# Altium PCB Board.PcbDoc (part 2 of 2)
Units mm, origin at the board's own origin, x right, y up, seen from the top; angles counter-clockwise.
Board outline 55 x 40 mm, 4 copper layers (Top Layer, Internal Plane 1, Internal Plane 2, Bottom Layer), stack 1.641 mm thick; 72 components, 51 nets, 279 pads, 135 vias.
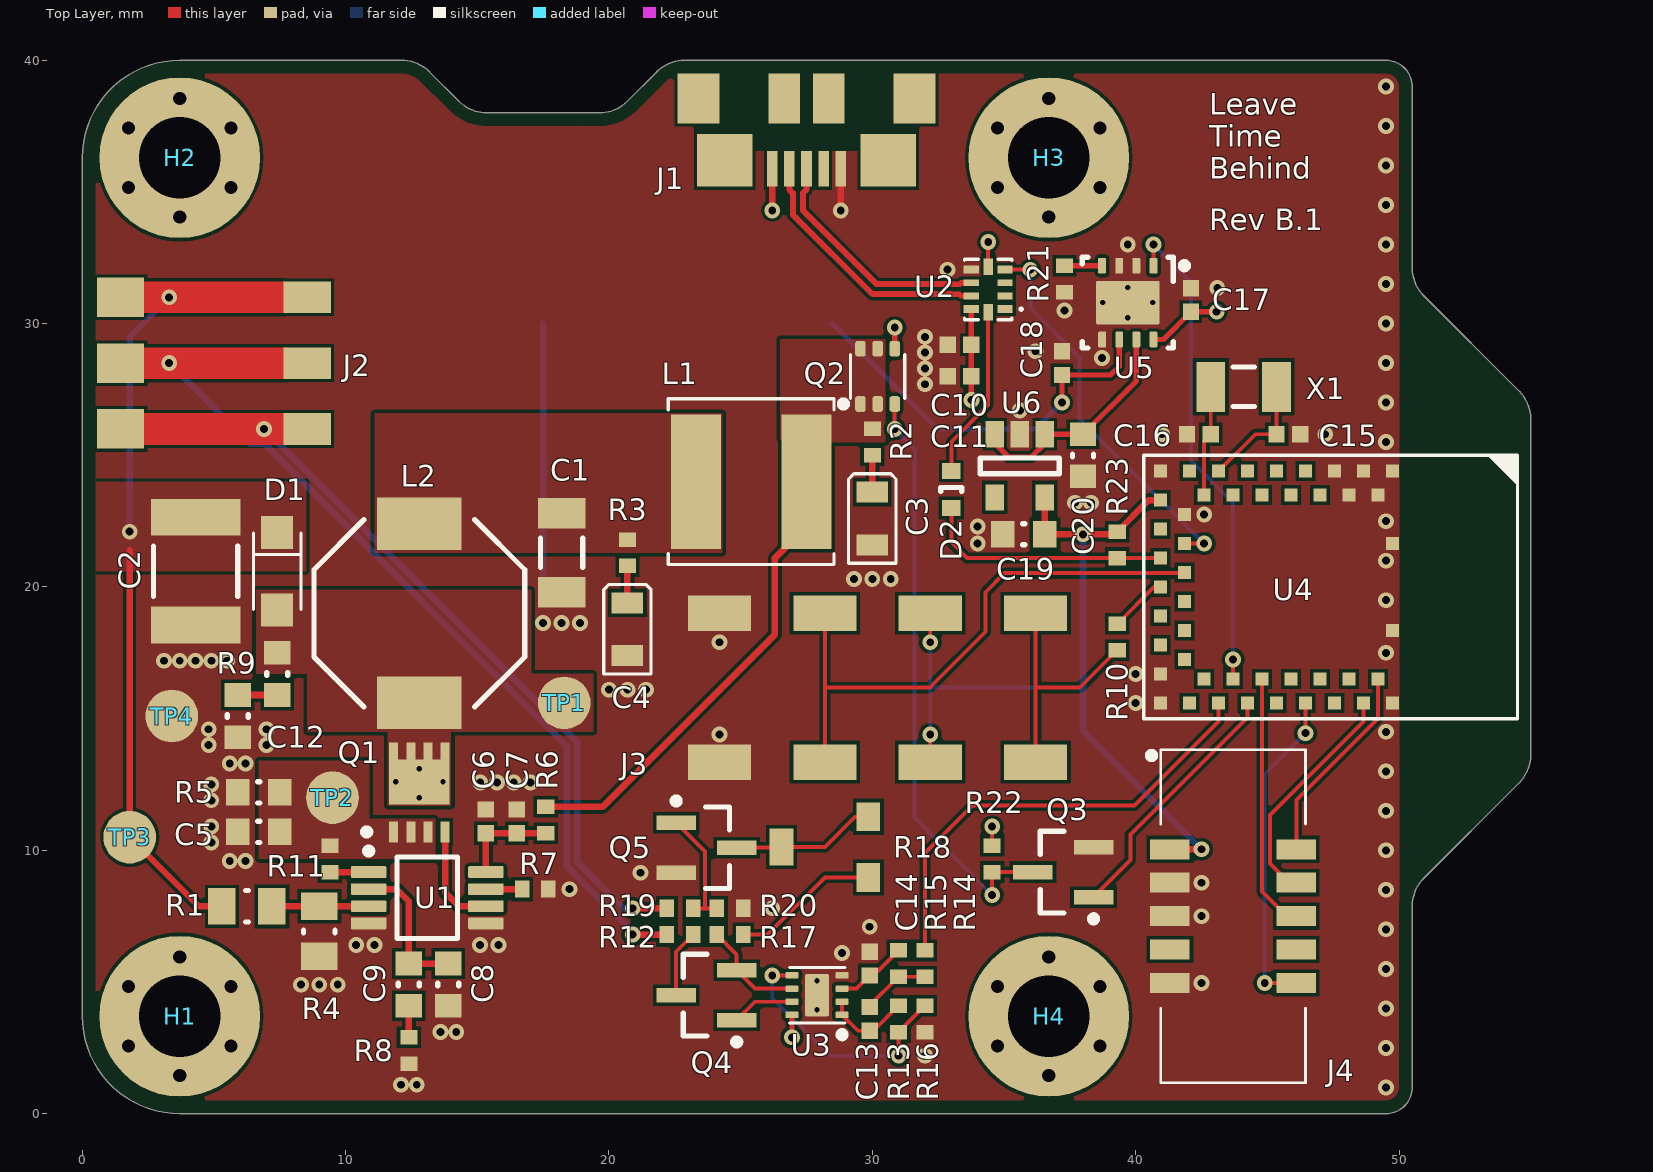
[diagram p0: Top Layer view]

## Part data (continued)
R9: library part CRCW06035R62FKEA, "RES SMD 5.62 OHM 1% 1/10W 0603", Case/Package=0603, Case Code (Metric)=1608, Manufacturer="Vishay Dale", Max Operating Temperature=155°C, Max Power Dissipation=100mW, Min Operating Temperature=-55°C, Package Quantity=10, Resistance=5.62R, Supplier Part Number 1=541-5.62HHCT-ND, Temperature Coefficient=100ppm/°C, Tolerance=1%, Voltage Rating=75V, Case Code (Imperial)=0603, ComponentLink1Description=http://www.vishay.com/docs/20035/dcrcwe3.pdf, ComponentLink1URL=http://www.vishay.com/docs/20035/dcrcwe3.pdf, Composition="Thick Film", Contact Plating=Tin, Depth=0.85mm, Features="Automotive AEC-Q200", Height=0.02inch, Lead Free="Lead Free", Length=1.55mm, Manufacturer Part Number=CRCW06035R62FKEA, Military Standard=Not, Number of Pins=2, Number of Terminations=2, Packaging="Tape and Reel", Power Rating=100mW, Pricing 1="1=0.1, 10=0.046, 100=0.0187, 1000=0.0084, 2500=0.00729 (USD)", Pricing 2="1=0.1, 10=0.044, 50=0.044, 100=0.026, 1000=0.018, 10000=0.006 (USD)", REACH SVHC=Unknown, Stock 1=1833, Stock 2=70897, Supplier 1=Digi-Key, Supplier 2=Mouser, Supplier Part Number 2=71-CRCW0603-5.62-E3, Voltage Rating (DC)=75V, Weight=7.1E-05oz, Width=0.033inch
R10: library part RC0402FR-07220RL, "RES SMD 220 OHM 1% 1/16W 0402", Case/Package=0402, Case Code (Metric)=1005, Manufacturer=Yageo, Max Operating Temperature=155°C, Max Power Dissipation=63mW, Min Operating Temperature=-55°C, Package Quantity=1, Power Rating=62.5mW, Resistance=220R, Supplier Part Number 1=311-220LRCT-ND, Temperature Coefficient=100ppm/°C, Tolerance=1%, Voltage Rating=50V, Case Code (Imperial)=0402, ComponentLink1Description=http://www.yageo.com/documents/recent/PYu-RC_Group_51_RoHS_L_9.pdf, ComponentLink1URL=http://www.yageo.com/documents/recent/PYu-RC_Group_51_RoHS_L_9.pdf, ComponentLink2Description=http://documents.rs-components.com/techlib://itc_doclist_GB.htm?stockno=6186324, ComponentLink2URL=http://documents.rs-components.com/techlib://itc_doclist_GB.htm?stockno=6186324, ComponentLink3Description=http://www.yageo.com/documents/recent/PYu-RC0402_51_RoHS_L_6_r.pdf, ComponentLink3URL=http://www.yageo.com/documents/recent/PYu-RC0402_51_RoHS_L_6_r.pdf, Composition="Thick Film", Depth=0.5mm, Features="Moisture Resistant", Height=0.016inch, Lead Free="Lead Free", Length=1mm, Manufacturer Part Number=RC0402FR-07220RL, Military Standard=Not, Number of Pins=2, Number of Terminations=2, Packaging="Tape and Reel", Pricing 1="1=0.1, 10=0.018, 100=0.0073, 1000=0.00329, 2500=0.00286, 5000=0.00236 (USD)", REACH SVHC="No SVHC", Stock 1=5150470, Supplier 1=Digi-Key, Termination=SMD/SMT, Voltage Rating (DC)=50V, Width=0.02inch
R11: library part RC0402FR-07470RL, "RES SMD 470 OHM 1% 1/16W 0402", Case/Package=0402, Case Code (Metric)=1005, Manufacturer=Yageo, Max Operating Temperature=155°C, Max Power Dissipation=63mW, Min Operating Temperature=-55°C, Package Quantity=1, Power Rating=62.5mW, Resistance=470R, Supplier Part Number 1=311-470LRCT-ND, Temperature Coefficient=100ppm/°C, Tolerance=1%, Voltage Rating=50V, Case Code (Imperial)=0402, ComponentLink1Description=http://www.yageo.com/documents/recent/PYu-RC_Group_51_RoHS_L_9.pdf, ComponentLink1URL=http://www.yageo.com/documents/recent/PYu-RC_Group_51_RoHS_L_9.pdf, ComponentLink2Description=http://www.yageo.com/documents/recent/PYu-RC_Group_51_RoHS_L_10.pdf, ComponentLink2URL=http://www.yageo.com/documents/recent/PYu-RC_Group_51_RoHS_L_10.pdf, ComponentLink3Description=http://www.farnell.com/datasheets/1018594.pdf, ComponentLink3URL=http://www.farnell.com/datasheets/1018594.pdf, ComponentLink4Description=https://www.verical.com/server-webapp/html/getDatasheet?partID=330246, ComponentLink4URL=https://www.verical.com/server-webapp/html/getDatasheet?partID=330246, ComponentLink5Description=http://documents.rs-components.com/techlib://itc_doclist_GB.htm?stockno=6184457, ComponentLink5URL=http://documents.rs-components.com/techlib://itc_doclist_GB.htm?stockno=6184457, Composition="Thick Film", Depth=0.5mm, Features="Moisture Resistant", Height=0.016inch, Lead Free="Lead Free", Length=1mm, Manufacturer Part Number=RC0402FR-07470RL, Military Standard=Not, Number of Terminations=2, Packaging="Tape and Reel", Pricing 1="1=0.1, 10=0.016, 100=0.0067, 1000=0.00301, 2500=0.00261, 5000=0.00215 (USD)", REACH SVHC=Unknown, Stock 1=6739352, Supplier 1=Digi-Key, Termination=SMD/SMT, Width=0.02inch
R12: library part RC0402FR-073KL, "RES SMD 3K OHM 1% 1/16W 0402", Manufacturer=Yageo, Operating Temperature="-55°C ~ 155°C", Package / Case="0402 (1005 Metric)", Power (Watts)="0.063W, 1/16W", Supplier Device Package=0402, Supplier Part Number 1=311-3KLRCT-ND, Temperature Coefficient=±100ppm/°C, Tolerance=±1%, Category=Resistors, ComponentLink1Description=http://www.yageo.com/documents/recent/PYu-RC_Group_51_RoHS_L_9.pdf, ComponentLink1URL=http://www.yageo.com/documents/recent/PYu-RC_Group_51_RoHS_L_9.pdf, Composition="Thick Film", Failure Rate=-, Features="Moisture Resistant", Height - Seated (Max)="0.016\" (0.40mm)", Manufacturer Part Number=RC0402FR-073KL, Packaging="Cut Tape (CT)", Part Status=Active, Pricing 1="1=0.1, 10=0.018, 100=0.0076, 1000=0.00356, 2500=0.00313, 5000=0.00263 (USD)", RoHS="RoHS Compliant", Size / Dimension="0.039\" L x 0.020\" W (1.00mm x 0.50mm)", Stock 1=3701800, Supplier 1=Digi-Key
R13: library part RC0402FR-0718KL, "RES SMD 18K OHM 1% 1/16W 0402", Manufacturer=Yageo, Operating Temperature="-55°C ~ 155°C", Package / Case="0402 (1005 Metric)", Power (Watts)="0.063W, 1/16W", Supplier Device Package=0402, Supplier Part Number 1=311-18.0KLRCT-ND, Temperature Coefficient=±100ppm/°C, Tolerance=±1%, Category=Resistors, ComponentLink1Description=http://www.yageo.com/documents/recent/PYu-RC_Group_51_RoHS_L_9.pdf, ComponentLink1URL=http://www.yageo.com/documents/recent/PYu-RC_Group_51_RoHS_L_9.pdf, Composition="Thick Film", Failure Rate=-, Features="Moisture Resistant", Height - Seated (Max)="0.016\" (0.40mm)", Manufacturer Part Number=RC0402FR-0718KL, Packaging="Cut Tape (CT)", Part Status=Active, Pricing 1="1=0.1, 10=0.018, 100=0.0076, 1000=0.00356, 2500=0.00313, 5000=0.00263 (USD)", RoHS="RoHS Compliant", Size / Dimension="0.039\" L x 0.020\" W (1.00mm x 0.50mm)", Stock 1=0, Supplier 1=Digi-Key
R14: library part RC0402FR-07300KL, "RES SMD 300K OHM 1% 1/16W 0402", Manufacturer=Yageo, Operating Temperature="-55°C ~ 155°C", Package / Case="0402 (1005 Metric)", Power (Watts)="0.063W, 1/16W", Supplier Device Package=0402, Supplier Part Number 1=311-300KLRCT-ND, Temperature Coefficient=±100ppm/°C, Tolerance=±1%, Category=Resistors, ComponentLink1Description=http://www.yageo.com/documents/recent/PYu-RC_Group_51_RoHS_L_9.pdf, ComponentLink1URL=http://www.yageo.com/documents/recent/PYu-RC_Group_51_RoHS_L_9.pdf, Composition="Thick Film", Failure Rate=-, Features="Moisture Resistant", Height - Seated (Max)="0.016\" (0.40mm)", Manufacturer Part Number=RC0402FR-07300KL, Packaging="Cut Tape (CT)", Part Status=Active, Pricing 1="1=0.1, 10=0.018, 100=0.0076, 1000=0.00356, 2500=0.00313, 5000=0.00263 (USD)", RoHS="RoHS Compliant", Size / Dimension="0.039\" L x 0.020\" W (1.00mm x 0.50mm)", Stock 1=1397022, Supplier 1=Digi-Key
R16 R21: library part RC0402FR-072KL, "RES SMD 2K OHM 1% 1/16W 0402", Manufacturer=Yageo, Operating Temperature="-55°C ~ 155°C", Package / Case="0402 (1005 Metric)", Power (Watts)="0.063W, 1/16W", Supplier Device Package=0402, Supplier Part Number 1=311-2KLRCT-ND, Temperature Coefficient=±100ppm/°C, Tolerance=±1%, Category=Resistors, ComponentLink1Description=http://www.yageo.com/documents/recent/PYu-RC_Group_51_RoHS_L_9.pdf, ComponentLink1URL=http://www.yageo.com/documents/recent/PYu-RC_Group_51_RoHS_L_9.pdf, Composition="Thick Film", Failure Rate=-, Features="Moisture Resistant", Height - Seated (Max)="0.016\" (0.40mm)", Manufacturer Part Number=RC0402FR-072KL, Packaging="Cut Tape (CT)", Part Status=Active, Pricing 1="1=0.1, 10=0.018, 100=0.0076, 1000=0.00356, 2500=0.00313, 5000=0.00263 (USD)", RoHS="RoHS Compliant", Size / Dimension="0.039\" L x 0.020\" W (1.00mm x 0.50mm)", Stock 1=8929494, Supplier 1=Digi-Key
R17: library part RC0402FR-0768RL, "RES SMD 68 OHM 1% 1/16W 0402", Manufacturer=Yageo, Operating Temperature="-55°C ~ 155°C", Package / Case="0402 (1005 Metric)", Power (Watts)="0.063W, 1/16W", Supplier Device Package=0402, Supplier Part Number 1=311-68.0LRCT-ND, Temperature Coefficient=±100ppm/°C, Tolerance=±1%, Category=Resistors, ComponentLink1Description=http://www.yageo.com/documents/recent/PYu-RC_Group_51_RoHS_L_9.pdf, ComponentLink1URL=http://www.yageo.com/documents/recent/PYu-RC_Group_51_RoHS_L_9.pdf, Composition="Thick Film", Failure Rate=-, Features="Moisture Resistant", Height - Seated (Max)="0.016\" (0.40mm)", Manufacturer Part Number=RC0402FR-0768RL, Packaging="Cut Tape (CT)", Part Status=Active, Pricing 1="1=0.1, 10=0.018, 100=0.0073, 1000=0.00329, 2500=0.00286, 5000=0.00236 (USD)", RoHS="RoHS Compliant", Size / Dimension="0.039\" L x 0.020\" W (1.00mm x 0.50mm)", Stock 1=0, Supplier 1=Digi-Key
R18: library part PVG3A200C01R00, "TRIMMER 20 OHM 0.25W J LEAD TOP", Manufacturer="Bourns Inc.", Power (Watts)="0.25W, 1/4W", Resistive Material=Cermet, Supplier Part Number 1=490-2647-1-ND, Temperature Coefficient=±150ppm/°C, Tolerance=±20%, Adjustment Type="Top Adjustment", Category="Potentiometers, Variable Resistors", ComponentLink1Description=https://www.bourns.com/docs/Product-Datasheets/pvg3.pdf, ComponentLink1URL=https://www.bourns.com/docs/Product-Datasheets/pvg3.pdf, Manufacturer Part Number=PVG3A200C01R00, Mounting Type="Surface Mount", Packaging="Cut Tape (CT)", Part Status=Active, Pricing 1="1=1.57, 10=1.386, 25=1.2476, 50=1.2012, 100=1.155, 250=1.08572, 500=0.924 (USD)", RoHS="RoHS Compliant", Size / Dimension="Rectangular - 0.142\" x 0.134\" Face x 0.079\" H (3.60mm x 3.40mm x 2.00mm)", Stock 1=42863, Supplier 1=Digi-Key, Termination Style="J Lead"
R19: library part RC0402FR-07330KL, "RES SMD 330K OHM 1% 1/16W 0402", Manufacturer=Yageo, Operating Temperature="-55°C ~ 155°C", Package / Case="0402 (1005 Metric)", Power (Watts)="0.063W, 1/16W", Supplier Device Package=0402, Supplier Part Number 1=311-330KLRCT-ND, Temperature Coefficient=±100ppm/°C, Tolerance=±1%, Category=Resistors, ComponentLink1Description=http://www.yageo.com/documents/recent/PYu-RC_Group_51_RoHS_L_9.pdf, ComponentLink1URL=http://www.yageo.com/documents/recent/PYu-RC_Group_51_RoHS_L_9.pdf, Composition="Thick Film", Failure Rate=-, Features="Moisture Resistant", Height - Seated (Max)="0.016\" (0.40mm)", Manufacturer Part Number=RC0402FR-07330KL, Packaging="Cut Tape (CT)", Part Status=Active, Pricing 1="1=0.1, 10=0.018, 100=0.0076, 1000=0.00356, 2500=0.00313, 5000=0.00263 (USD)", RoHS="RoHS Compliant", Size / Dimension="0.039\" L x 0.020\" W (1.00mm x 0.50mm)", Stock 1=1954423, Supplier 1=Digi-Key
R20: library part RC0402FR-0730KL, "RES SMD 30K OHM 1% 1/16W 0402", Manufacturer=Yageo, Operating Temperature="-55°C ~ 155°C", Package / Case="0402 (1005 Metric)", Power (Watts)="0.063W, 1/16W", Supplier Device Package=0402, Supplier Part Number 1=311-30.0KLRCT-ND, Temperature Coefficient=±100ppm/°C, Tolerance=±1%, Category=Resistors, ComponentLink1Description=http://www.yageo.com/documents/recent/PYu-RC_Group_51_RoHS_L_9.pdf, ComponentLink1URL=http://www.yageo.com/documents/recent/PYu-RC_Group_51_RoHS_L_9.pdf, Composition="Thick Film", Failure Rate=-, Features="Moisture Resistant", Height - Seated (Max)="0.016\" (0.40mm)", Manufacturer Part Number=RC0402FR-0730KL, Packaging="Cut Tape (CT)", Part Status=Active, Pricing 1="1=0.1, 10=0.018, 100=0.0076, 1000=0.00356, 2500=0.00313, 5000=0.00263 (USD)", RoHS="RoHS Compliant", Size / Dimension="0.039\" L x 0.020\" W (1.00mm x 0.50mm)", Stock 1=3148260, Supplier 1=Digi-Key
R22 R23: library part RC0402FR-07100KL, "RES SMD 100K OHM 1% 1/16W 0402", Manufacturer=Yageo, Operating Temperature="-55°C ~ 155°C", Package / Case="0402 (1005 Metric)", Power (Watts)="0.063W, 1/16W", Supplier Device Package=0402, Supplier Part Number 1=311-100KLRCT-ND, Temperature Coefficient=±100ppm/°C, Tolerance=±1%, Category=Resistors, ComponentLink1Description=http://www.yageo.com/documents/recent/PYu-RC_Group_51_RoHS_L_9.pdf, ComponentLink1URL=http://www.yageo.com/documents/recent/PYu-RC_Group_51_RoHS_L_9.pdf, Composition="Thick Film", Failure Rate=-, Features="Moisture Resistant", Height - Seated (Max)="0.016\" (0.40mm)", Manufacturer Part Number=RC0402FR-07100KL, Packaging="Cut Tape (CT)", Part Status=Active, Pricing 1="1=0.1, 10=0.018, 100=0.0076, 1000=0.00356, 2500=0.00313, 5000=0.00263 (USD)", RoHS="RoHS Compliant", Size / Dimension="0.039\" L x 0.020\" W (1.00mm x 0.50mm)", Stock 1=20396473, Supplier 1=Digi-Key
U1: "TEXAS INSTRUMENTS   LM3478MM/NOPB.   N-CHANNEL CONTROLLER, MSOP-8, FULL REEL", Case/Package=MSOP, Frequency=400kHz, Manufacturer="Texas Instruments", Max Frequency=1MHz, Max Input Voltage=40V, Max Operating Temperature=125°C, Max Output Current=2A, Max Output Voltage=5V, Min Input Voltage=2.97V, Min Operating Temperature=-40°C, Output Current=1A, Output Voltage=1.26V, Package Quantity=1000, Quiescent Current=2.7mA, Supplier Part Number 1=LM3478MM/NOPBCT-ND, ComponentLink1Description=https://www.verical.com/server-webapp/html/getDatasheet?partID=123464, ComponentLink1URL=https://www.verical.com/server-webapp/html/getDatasheet?partID=123464, ComponentLink2Description=http://www.ti.com/general/docs/lit/getliterature.tsp?genericPartNumber=LM3478&fileType=pdf, ComponentLink2URL=http://www.ti.com/general/docs/lit/getliterature.tsp?genericPartNumber=LM3478&fileType=pdf, ComponentLink3Description=http://www.ti.com/lit/ds/symlink/lm3478.pdf, ComponentLink3URL=http://www.ti.com/lit/ds/symlink/lm3478.pdf, ComponentLink4Description=https://www.distrelec.com/ishop/Datasheets/lm3478_eng_tds.pdf, ComponentLink4URL=https://www.distrelec.com/ishop/Datasheets/lm3478_eng_tds.pdf, Contact Plating=Matte,Tin, Duty Cycle=100%, Height=0.86mm, Lead Free="Lead Free", Length=3mm, Manufacturer Part Number=LM3478MM/NOPB, Max Duty Cycle=100%, Max Supply Voltage=40V, Min Supply Voltage=2.97V, Mount="Surface Mount", Number of Outputs=1, Number of Pins=8, Output Type=Adjustable, Packaging="Tape and Reel", Pricing 1="1=2.21, 10=1.982, 100=1.5928, 500=1.30862 (USD)", Radiation Hardening=No, REACH SVHC="No SVHC", Stock 1=61350, Supplier 1=Digi-Key, Supplier 2=Mouser, Supplier Part Number 2=926-LM3478MM/NOPB, Switching Frequency=1MHz, Termination=SMD/SMT, Topology=Boost,Flyback, Width=3mm
U2: "SPST USB 2.0 High-Speed Switch With Battery Charging Detection", Supplier Part Number 1=296-37689-1-ND, Built_By=EMA_UL_Team, C="Copyright (C) 2016 Accelerated Designs. All rights reserved", Manufacturer_Part_Number=BQ24392RSER, RefDes=RefDes, Supplier 1=Digi-Key, Supplier 2=Mouser, Supplier Part Number 2=595-BQ24392RSER, Type=Type, Vendor="Texas Instruments"
U3: library part TLV9062IDSGR, "CMOS Amplifier 2 Circuit Rail-to-Rail 8-WSON (2x2)", Current - Supply=538µA, Manufacturer="Texas Instruments", Operating Temperature="-40°C ~ 125°C (TA)", Package / Case="8-WFDFN Exposed Pad", Supplier Device Package="8-WSON (2x2)", Supplier Part Number 1=296-50013-1-ND, Voltage - Supply, Single/Dual (±)="1.8 V ~ 5.5 V", Amplifier Type=CMOS, Category="Integrated Circuits (ICs)", ComponentLink1Description=http://www.ti.com/lit/ds/symlink/tlv9062.pdf, ComponentLink1URL=http://www.ti.com/lit/ds/symlink/tlv9062.pdf, Manufacturer Part Number=TLV9062IDSGR, Mounting Type="Surface Mount", Output Type=Rail-to-Rail, Packaging="Cut Tape (CT)", Part Status=Active, Pricing 1="1=0.65, 10=0.556, 100=0.4153, 500=0.3263, 1000=0.25214 (USD)", RoHS="RoHS Compliant", Slew Rate="6.5 V/µs", Stock 1=2198, Supplier 1=Digi-Key
U4: library part BMD-300-A, "Bluetooth 4.2 LE Module, nRF52832, 512kB Flash, 64kB RAM", Case/Package=Module, Current - Receiving=10.4mA, Current - Transmitting=17mA, Frequency=2.4GHz, Manufacturer=Rigado, Manufacturer P/N=BMD-300-A-R, Max Operating Temperature=85°C, Min Operating Temperature=-40°C, Supplier Part Number 1=1604-1006-1-ND, Added By="Cam N", Added Date=10/14/2015, Data Rate=2Mbps, Height=1.9mm, Interface=I2C,SPI,UART, Internal Antenna=Yes, Manufacturer Part Number=BMD-300-A-R, Memory Size=64KB, Mount="Surface Mount", Packaging="Tape and Reel", Part Number=BMD-300-A, Protocol="BLE 4.2", RF Freq=2.4GHz, Sensitivity=-96dBm, Size="14mm x 9.8mm", Supplier 1=Digi-Key
U5: library part TPS2113ADRB, "Dual In / Single Out Autoswitching Power Mux, 2.8 to 5.5 V, -40 to 85 degC, 9-pin SON (DRB), Green (RoHS & no Sb/Br)", Case/Package=TSSOP, Current - Output 2=1.25A, IN1, IN2 Input Voltage(Max)(V)=5.5, IN1, IN2 Input Voltage(Min)(V)=2.8, IN1 Output Current(Max)(A)=1.25, Manufacturer="Texas Instruments", Max Input Voltage=5.5V, Max Operating Temperature=85°C, Min Input Voltage=2.8V, Min Operating Temperature=-40°C, Package Quantity=3000, Supplier Part Number 1=296-46373-1-ND, ComponentLink1Description=Datasheet, ComponentLink1URL=http://www.ti.com/general/docs/lit/getliterature.tsp?genericPartNumber=TPS2113A&fileType=pdf, ComponentLink2Description=http://www.ti.com/general/docs/lit/getliterature.tsp?genericPartNumber=TPS2113A&&fileType=pdf, ComponentLink2URL=http://www.ti.com/general/docs/lit/getliterature.tsp?genericPartNumber=TPS2113A&&fileType=pdf, ComponentLink3Description=https://www.verical.com/server-webapp/html/getDatasheet?partID=627486, ComponentLink3URL=https://www.verical.com/server-webapp/html/getDatasheet?partID=627486, ComponentLink4Description=http://www.ti.com/lit/ds/symlink/tps2113a.pdf, ComponentLink4URL=http://www.ti.com/lit/ds/symlink/tps2113a.pdf, DatasheetVersion=SBVS045C, Eco-Plan="Green (RoHS & no Sb/Br)", IN1 rDS(on)(Typ)(mOhm)=84, IN2 Output Current(Max)(A)=1.25, IN2 rDS(on)(Typ)(Ohms)=0.084, Lead Free="Lead Free", Manufacturer Part Number=TPS2113ADRBR, Max Output Current=1.25A, Mounting Technology="Surface Mount", Number of Inputs=2, Number of Outputs=1, Number of Pins=8, Operating Supply Voltage=5.5V, Output Current=1.25A, PackageDescription="8-Pin Plastic Small Outline No-Lead, 3 x 3 x 1 mm Body, 0.65 mm Pitch, Exposed Pad", PackageReference=DRB0008B, PackageVersion="revK, Jun-2012", Packaging="Tape and Reel", PartNumber=TPS2113ADRBR, Pricing 1="1=2.01, 10=1.801, 100=1.448, 500=1.18966, 1000=0.98571 (USD)", Radiation Hardening=No, Stock 1=8863, SubFamily="Power Multiplexer (MUX)", Supplier 1=Digi-Key, Turn-On Delay Time=1ms
U6: library part NCP114ASN330T1G, "IC REG LINEAR 3.3V 300MA 5TSOP", Manufacturer="ON Semiconductor", Output Current=300mA, Supplier Part Number 1=NCP114ASN330T1GOSCT-ND, Lead Free="Lead Free", Manufacturer Part Number=NCP114ASN330T1G, Pricing 1="1=0.35, 10=0.264, 100=0.1493, 500=0.09888, 1000=0.07581 (USD)", Stock 1=16190, Supplier 1=Digi-Key, Supplier 2=Mouser, Supplier Part Number 2=863-NCP114ASN330T1G
X1: library part ECS-.327-9-34B-C-TR, "CRYSTAL 32.7680KHZ 9PF SMD", Case/Package=SMD/SMT, ESR (Equivalent Series Resistance)=70kR, Frequency Stability=10ppm, Load Capacitance=9pF, Manufacturer="ECS International", Max Operating Temperature=85°C, Min Operating Temperature=-40°C, Package Quantity=3000, Supplier Part Number 1=XC1949CT-ND, ComponentLink1Description=http://www.ecsxtal.com/store/pdf/ecx-31b.pdf, ComponentLink1URL=http://www.ecsxtal.com/store/pdf/ecx-31b.pdf, Frequency=32.768kHz, Frequency Tolerance=10ppm, Height=0.035inch, Lead Pitch=2.4mm, Length=0.126inch, Manufacturer Part Number=ECS-.327-9-34B-C-TR, Mount="Surface Mount", Number of Pins=2, Packaging="Tape and Reel", Pricing 1="1=0.81, 10=0.712, 50=0.666, 100=0.5886, 500=0.55758, 1000=0.46466 (USD)", Stock 1=17736, Supplier 1=Digi-Key, Termination=SMD/SMT, Width=0.061inch

## Via types
v1: diameter 0.6, hole 0.3, Top Layer to Bottom Layer, tented both sides, 125 vias
v2: diameter 0.5, hole 0.2, Top Layer to Bottom Layer, tented bottom, 10 vias

## Nets (pads, with @x,y where several pads share a name; then routed paths per layer and width w, separated by ;. In a path a pad name is that pad's centre, name@x,y a point inside that pad or via, vN(x,y) a via of type N, cw(c..) or ccw(c..) an arc to the next point about the centre after c; other vN are vias at no path point)
3V3: C19.2 J3.2 J4.1 R23.2 U4.17 U6.5 | length 32.8
  Top Layer w0.15: J3.2@32.2,13.35 v1(32.2,14.4) ; v1(32.2,17.9) J3.2@32.2,19
  Top Layer w0.25: U6.5 C19.2 v1(38,22) 39.2,22 R23.2 40.5,23.3 U4.17 ; J4.1 v1(42.5,10.04)
  Bottom Layer w0.15: v1(32.2,14.4) 32.2,16.2 v1(32.2,17.9) ; 32.2,16.175 38,16.175
  Bottom Layer w0.25: v1(38,22) 38,16.2 38,14.54 v1(42.5,10.04)
C\H\G\_\A\L\: U2.4 U4.20 | length 14.8
  Top Layer w0.15: U2.4 v1(36,32.05) ; U4.20 v1(42.6,21.65)
  Bottom Layer w0.15: v1(36,32.05) 36,30.589 37.875,28.714 37.875,26.375 v1(42.6,21.65)
CHG_DET: D2.1 U2.10 | length 6.6
  Top Layer w0.15: D2.1 33,25.515 34.4,26.915 U2.10
FB: R1.1 R4.2 U1.3 | length 3.7
  Top Layer w0.25: R1.1 R4.2 U1.3
Gate: Q1.4 U1.6 | length 4.1
  Top Layer w0.25: Q1.4 13.775,8.4 14.3,7.875 U1.6
GND: BT1.2 C1.1 C2.1 C3.2 C4.2 C5.1 C6.1 C7.1 C8.1 C10.1 C11.1 C12.1 C14.1 C15.1 C16.1 C17.1 C18.1 C19.1 C20.1 J1.5 J3.4 J4.3 J4.5 J4.9 Q3.2 Q5.2 R4.1 R5.1 R7.1 R8.1 R16.1 R20.1 R21.1 TP4.1 U1.4 U1.5 U2.6 U3.4 U3.9 U4.1 U4.2 U4.3 U4.4 U4.5 U4.16 U4.18 U4.29 U4.30 U4.45 U4.46 U4.47 U5.2 U5.3 U5.5 U5.9 U6.2 | length 11.4
  Top Layer w0.25: v1(28.8,34.3) J1.5 ; v1@28.839,34.357 v1@28.896,34.3
  Bottom Layer w0.25: 17.5,20.3 BT1.2
  other v1: 49.5,1 12.1,1.1 12.7,1.1 32,2.2 49.5,2.5 13.6,3.1 14.2,3.1 49.5,4 8.3,4.9 9,4.9 9.7,4.9 42.5,4.96 49.5,5.5 28.85,6.1 10.4,6.4 11.1,6.4 15.1,6.4 15.8,6.4 49.5,7 29.9,7.1 42.5,7.5 26.2,7.8 49.5,8.5 18.5,8.525 42.5,8.77 21.2,9.15 5.6,9.6 6.2,9.6 49.5,10 4.9,10.3 4.9,10.9 49.5,11.5 4.9,11.9 4.9,12.5 15.113,12.573 15.748,12.573 16.383,12.573 17.018,12.573 49.5,13 5.6,13.3 6.2,13.3 4.8,14 7,14 24.2,14.4 49.5,14.5 4.8,14.6 7,14.6 40,15.6 20,16.1 20.7,16.1 21.4,16.1 40,16.7 3.1,17.2 3.7,17.2 4.3,17.2 4.9,17.2 5.5,17.2 49.5,17.5 24.2,17.9 17.5,18.635 18.2,18.635 18.9,18.635 49.5,19.5 29.3,20.3 30,20.3 30.7,20.3 49.5,21 34,21.65 34,22.3 49.5,22.5 42.6,22.75 37.7,23.2 38.3,23.2 49.5,25.5 41,25.8 47.2,25.8 35.6,26.7 49.5,27 32,27.7 32,28.3 49.5,28.5 38.725,28.7 32,28.9 36.2,28.95 32,29.5 49.5,30 37.3,30.5 43.1,31.35 49.5,31.5 32.86,32.05 39.7,33 49.5,33 49.5,34.5 49.5,36 49.5,37.5 49.5,39
  other v2: 27.9,3.95 27.9,5.05 39.7,30.225 38.75,30.8 40.65,30.8 39.7,31.375
Isense: R11.1 U1.1 | length 1.5
  Top Layer w0.25: R11.1 U1.1
NetBT1_1: BT1.1 C18.2 U5.6 | length 15.2
  Top Layer w0.2: v1(37.2,27) C18.2 39.05,28.05 39.375,28.375 U5.6
  Bottom Layer w0.2: BT1.1@28.485,30 32.485,26 36.2,26 v1(37.2,27)
NetC1_2: C1.2 L1.2 L2.1 R3.2
NetC3_1: C3.1 R2.1 | length 1.4
  Top Layer w0.25: C3.1@30,23.6 R2.1
NetC4_1: C4.1 R3.1 | length 1.4
  Top Layer w0.25: C4.1 R3.1
NetC6_2: C6.2 C7.2 R6.1 U1.8 | length 3.8
  Top Layer w0.25: U1.8 C6.2 C7.2 R6.1
NetC8_2: C8.2 C9.2 U1.2 | length 5.6
  Top Layer w0.25: U1.2 11.939,8.525 12.4,8.064 C9.2 C8.2
NetC9_1: C9.1 R8.2 | length 1.2
  Top Layer w0.25: R8.2 C9.1
NetC12_2: C12.2 R9.1 | length 1.5
  Top Layer w0.25: C12.2 R9.1
NetC13_1: C13.1 R14.2 R15.1 | length 2.6
  Top Layer w0.15: C13.1 29.9,4.1 R15.1 R14.2
NetC13_2: C13.2 R13.1 U3.1 U3.2 | length 3.3
  Top Layer w0.15: U3.2 U3.1 29.45,3.15 C13.2 30.05,3.15 R13.1
NetC14_2: C14.2 R15.2 U3.3 | length 2.8
  Top Layer w0.15: U3.3 29.4,4.75 C14.2 30.05,5.25 R15.2
NetC15_2: C15.2 U4.13 X1.2 | length 4.6
  Top Layer w0.15: U4.13 44.55,25.8 C15.2 X1.2
NetC16_2: C16.2 U4.14 X1.1 | length 4.3
  Top Layer w0.15: U4.14 42.6,25.55 C16.2 X1.1@42.85,27.7
NetC20_2: C20.2 U5.7 U6.1 U6.3 | length 8.9
  Top Layer w0.2: U6.3 34.65,25.45 35.164,24.936 36.036,24.936 36.55,25.45 U6.1 C20.2 40.025,27.825 U5.7
NetD2_2: D2.2 R23.1 U4.21 | length 9.5
  Top Layer w0.15: D2.2 33,21.7 33.6,21.1 R23.1 U4.21
NetQ2_3: Q2.3 Q3.3 R22.1 | length 22.6
  Top Layer w0.15: v1(30.85,26) Q2.3 ; v1(34.55,8.3) R22.1 Q3.3
  Bottom Layer w0.15: v1(30.85,26) 31.6,25.25 31.6,11.25 v1(34.55,8.3)
NetQ4_1: Q4.1 U3.7 | length 2.4
  Top Layer w0.15: Q4.1 25.55,4.25 U3.7
NetQ4_2: Q4.2 R17.2 U3.6 | length 4
  Top Layer w0.15: R17.2 24.85,6.05 Q4.2 25.552,4.748 U3.6@26.948,4.748
NetQ4_3: Q4.3 R12.1 | length 2.6
  Top Layer w0.15: Q4.3 22.55,6.15 R12.1
NetQ5_1: Q5.1 R19.1 R20.2 | length 4.6
  Top Layer w0.15: Q5.1 23.65,9.95 23.65,7.8 ; R19.1 23.65,7.8 ; R20.2 23.65,7.8
NetQ5_3: Q5.3 R18.1 R18.2 | length 5.5
  Top Layer w0.15: Q5.3 R18.2@26.55,10.1 ; R18.2 28.2,10.125 29.35,11.275 R18.1
NetR7_2: R7.2 U1.7 | length 1.4
  Top Layer w0.25: U1.7 R7.2
NetR10_2: R10.2 U4.23 | length 2.2
  Top Layer w0.15: R10.2 40.7,20 U4.23
NetR13_2: R13.2 R16.2 U3.5 | length 9.6
  Top Layer w0.15: v1(26.2,5.25) U3.5 ; v1(31,2.2) R13.2 R16.2
  Bottom Layer w0.15: v1(26.2,5.25) 26.2,4.4 28.4,2.2 v1(31,2.2)
NetR17_1: R17.1 R18.3 | length 5.7
  Top Layer w0.15: R17.1 26.025,6.8 28.2,8.975 R18.3
NetR21_2: R21.2 U5.4 | length 1.4
  Top Layer w0.2: R21.2 U5.4
"Nixie Aux": J2.3 R19.2 | length 25.5
  Top Layer w0.25: v1(20.9,7.8) R19.2
  Bottom Layer w0.25: v1(6.9,26) 18.8,14.1 18.8,9.539 20.539,7.8 v1(20.9,7.8)
"Nixie Ind": J2.2 R12.2 | length 30.6
  Top Layer w0.25: v1(20.9,6.8) R12.2
  Bottom Layer w0.25: v1(3.3,28.5) 6.352,25.448 6.919,25.448 18.4,13.967 18.4,9.406 20.9,6.906 v1(20.9,6.8)
PWR_EN: Q3.1 U4.35 | length 9.8
  Top Layer w0.15: Q3.1 39.8,9.625 39.8,10.6 44.25,15.05 U4.35
PwrStat: U4.34 U5.1 | length 18.6
  Top Layer w0.15: U5.1 v1(40.675,33) ; U4.34 v1(43.7,17.25)
  Bottom Layer w0.15: v1(40.675,33) 42.1,31.575 42.1,24.8 43.7,23.2 v1(43.7,17.25)
R\E\S\E\T\: J4.10 U4.39 | length 12.5
  Top Layer w0.15: v1(44.9,4.96) J4.10@46.074,4.96 ; v1(46.45,14.45) U4.39
  Bottom Layer w0.15: v1(44.9,4.96) 44.9,12.9 v1(46.45,14.45)
SENSE: C5.2 Q1.1 Q1.2 Q1.3 R5.2 R11.2 TP2.1
SetButton: J3.3 U4.22 | length 22
  Top Layer w0.15: J3.3@28.2,13.35 28.2,16.175 ; J3.3@28.2,19 28.2,16.175 ; U4.22 41.823,20.523 35.023,20.523 34.3,19.8 34.3,18.3 32.175,16.175 28.2,16.175
SetLED: J3.1 R10.1 | length 9.3
  Top Layer w0.15: J3.1@36.2,13.35 36.2,16.175 ; J3.1@36.2,19 36.2,16.175 ; R10.1 37.875,16.175 36.2,16.175
SW: D1.A L2.2 Q1.5 Q1.6 Q1.7 Q1.8 Q1.9 R9.2 TP1.1
  other v2: 12.8,12 11.9,12.6 13.7,12.6 12.8,13.1
SWDCLK: J4.4 U4.43 | length 8.9
  Top Layer w0.15: J4.4 45.83,8.77 45.102,9.498 45.102,11.344 48.65,14.892 U4.43
SWDIO: J4.2 U4.44 | length 7.7
  Top Layer w0.15: J4.2 46.1,11.914 49.2,15.014 U4.44
SWO: J4.6 U4.36 | length 9.8
  Top Layer w0.15: U4.36 44.8,8.431 45.731,7.5 J4.6
TimePWM3V3: R14.1 U4.33 | length 17.6
  Top Layer w0.15: R14.1 32,9.9 33.8,11.7 39.95,11.7 43.15,14.9 U4.33
USBD_N: J1.2 U2.8 | length 9.8
  Top Layer w0.203: 33,31.119 33.299,31.119 33.368,31.05 U2.8
  Top Layer w0.229: J1.2 26.85,35.086 26.985,34.951 26.985,34.142 30.008,31.119 33,31.119
USBD_P: J1.3 U2.7 | length 9.2
  Top Layer w0.203: 33,31.5 33.318,31.5 33.368,31.55 U2.7
  Top Layer w0.229: J1.3 27.5,35.086 27.366,34.951 27.366,34.3 30.165,31.5 33,31.5
Vbus: C10.2 C11.2 C17.2 J1.1 Q2.4 R22.2 U2.5 U2.9 U3.8 U5.8 | length 11.2
  Top Layer w0.15: U2.5 v1(34.4,33.1) ; R22.2 v1(34.55,10.9)
  Top Layer w0.2: v1(26.95,2.9) U3.8 ; Q2.4 v1(30.85,29.85) ; v1(33.76,27.1) C10.2 C11.2 U2.9 ; U5.8 41.05,29.4 C17.2 v1(43.075,30.45)
  Top Layer w0.25: v1(26.2,34.3) J1.1
Vin: L1.1 Q2.1 Q2.2 Q2.5 Q2.6 R2.2 R6.2 | length 17.7
  Top Layer w0.25: R6.2 19.75,11.65 26.3,18.2 26.3,21.1 27.5,22.3 L1.1
Vout: C2.2 D1.K J2.1 R1.2 TP3.1 | length 25
  Top Layer w0.25: 1.8,21.4 TP3.1 4.425,7.875 R1.2
  Bottom Layer w0.25: v1(1.8,22.1) 1.8,29.5 v1(3.3,31)
pads on no net: H1. H2. H3. H4. J1.4 J1.S1 J1.S2 J1.S3 J1.S4 J1.S5 J1.S6 J4.7 J4.8 U2.1 U2.2 U2.3 U4.6 U4.7 U4.8 U4.9 U4.10 U4.11 U4.12 U4.15 U4.19 U4.24 U4.25 U4.26 U4.27 U4.28 U4.31 U4.32 U4.37 U4.38 U4.40 U4.41 U4.42 U6.4

## Polygon pours and split planes (outlines as drawn)
GND on Top Layer "Top GND" (solid, remove dead copper, pour order 22): -3.461,-2.935 -3.461,45.465 63.039,45.465 63.039,-2.935
Vin on Top Layer "Vin" (solid, pour order 16): 26.5,29.4 30.5,29.4 30.5,25.5 26.5,25.5
NetC1_2 on Top Layer "NETC1_2_L01_P018" (solid, pour order 18): 11.1,21.3 11.1,26.6 24.3,26.6 24.3,21.3
SW on Top Layer "SW" (solid, pour order 12): 6.6,19.9 17.05,19.9 17.05,16.7 19.4,16.7 19.4,14.5 14,14.5 14,11.7 11.6,11.7 11.6,14.5 8.55,14.5 8.55,16.7 6.6,16.7
SENSE on Top Layer "SENSE" (solid, remove dead copper, pour order 14): 6.7,9.675 13.4,9.675 13.4,11.2 10.9,11.2 10.9,13.4 6.7,13.4
Vout on Top Layer "VOUT_L01_P020" (solid, pour order 20): 0.5,20.6 8.5,20.6 8.5,24 0.5,24
GND on Bottom Layer "Bottom GND" (solid, remove dead copper, pour order 10): -3.461,-2.282 -3.461,45.618 59.039,45.618 59.039,-2.282
SW on Bottom Layer "SW_L04_P002" (solid, pour order 2): 7.7,16.7 14.6,16.7 14.6,7.4 7.7,7.4
GND on Internal Plane 1 (split plane): 3.7,39.49 12.129,39.49 12.141,39.491 12.258,39.483 12.386,39.458 12.508,39.416 12.625,39.359 12.733,39.287 12.821,39.21 12.829,39.2 13.95,38.079 13.951,38.078 14.096,37.946 14.255,37.829 14.424,37.727 14.602,37.643 14.788,37.576 14.979,37.528 15.175,37.499 15.371,37.49 15.372,37.49 19.629,37.49 19.63,37.49 19.826,37.499 20.021,37.528 20.213,37.576 20.398,37.643 20.577,37.727 20.746,37.829 20.904,37.946 21.05,38.078 21.051,38.079 22.172,39.2 22.18,39.21 22.268,39.287 22.376,39.359 22.492,39.416 22.615,39.458 22.742,39.483 22.859,39.491 22.872,39.49 49.5,39.49 49.512,39.491 49.596,39.483 49.689,39.455 49.774,39.409 49.848,39.348 49.909,39.273 49.955,39.188 49.983,39.096 49.991,39.012 49.99,39 49.99,32.121 50,31.924 50,31.921 50,8.079 50,8.076 49.99,7.88 49.99,7.879 49.99,1 49.991,0.989 49.983,0.904 49.955,0.812 49.909,0.727 49.848,0.652 49.774,0.591 49.689,0.546 49.596,0.518 49.512,0.509 49.5,0.511 3.7,0.511 3.683,0.509 3.45,0.518 3.201,0.548 2.955,0.596 2.714,0.664 2.479,0.751 2.251,0.856 2.033,0.979 1.824,1.118 1.627,1.273 1.443,1.443 1.273,1.627 1.118,1.824 0.979,2.032 0.856,2.251 0.751,2.479 0.665,2.714 0.597,2.955 0.548,3.201 0.518,3.45 0.509,3.683 0.511,3.7 0.511,36.3 0.509,36.317 0.518,36.551 0.548,36.799 0.597,37.045 0.665,37.286 0.751,37.522 0.856,37.749 0.979,37.968 1.118,38.176 1.273,38.373 1.443,38.557 1.627,38.727 1.824,38.882 2.033,39.022 2.251,39.144 2.479,39.249 2.714,39.336 2.955,39.404 3.201,39.453 3.45,39.482 3.683,39.491
Vbus on Internal Plane 2 (split plane): 3.7,39.49 12.129,39.49 12.141,39.491 12.258,39.483 12.386,39.458 12.508,39.416 12.625,39.359 12.733,39.287 12.821,39.21 12.829,39.2 13.95,38.079 13.951,38.078 14.096,37.946 14.255,37.829 14.424,37.727 14.602,37.643 14.788,37.576 14.979,37.528 15.175,37.499 15.371,37.49 15.372,37.49 19.629,37.49 19.63,37.49 19.826,37.499 20.021,37.528 20.213,37.576 20.398,37.643 20.577,37.727 20.746,37.829 20.904,37.946 21.05,38.078 21.051,38.079 22.172,39.2 22.18,39.21 22.268,39.287 22.376,39.359 22.492,39.416 22.615,39.458 22.742,39.483 22.859,39.491 22.872,39.49 49.5,39.49 49.512,39.491 49.596,39.483 49.689,39.455 49.774,39.409 49.848,39.348 49.909,39.273 49.955,39.188 49.983,39.096 49.991,39.012 49.99,39 49.99,32.121 50,31.924 50,31.921 50,8.079 50,8.076 49.99,7.88 49.99,7.879 49.99,1 49.991,0.989 49.983,0.904 49.955,0.812 49.909,0.727 49.848,0.652 49.774,0.591 49.689,0.546 49.596,0.518 49.512,0.509 49.5,0.511 3.7,0.511 3.683,0.509 3.45,0.518 3.201,0.548 2.955,0.596 2.714,0.664 2.479,0.751 2.251,0.856 2.033,0.979 1.824,1.118 1.627,1.273 1.443,1.443 1.273,1.627 1.118,1.824 0.979,2.032 0.856,2.251 0.751,2.479 0.665,2.714 0.597,2.955 0.548,3.201 0.518,3.45 0.509,3.683 0.511,3.7 0.511,36.3 0.509,36.317 0.518,36.551 0.548,36.799 0.597,37.045 0.665,37.286 0.751,37.522 0.856,37.749 0.979,37.968 1.118,38.176 1.273,38.373 1.443,38.557 1.627,38.727 1.824,38.882 2.033,39.022 2.251,39.144 2.479,39.249 2.714,39.336 2.955,39.404 3.201,39.453 3.45,39.482 3.683,39.491

## Keep-outs
Bottom Layer:
  region: 17.5,30
Keep-Out Layer:
  region: 18.8,37.6

## Other copper
Top Layer:
  pour cut-out: 50,40 50,0 58,0 58,40
Bottom Layer:
  pour cut-out: 50,40 50,0 58,0 58,40
Internal Plane 1 (plane layer: these items are gaps in the copper):
  rectangle: 50,0 60,40
Internal Plane 2 (plane layer: these items are gaps in the copper):
  rectangle: 50,0 60,40

## Silkscreen, mask and mechanical layers (free items; w line width, h text height)
Top Overlay:
  text "Leave / Time / Behind" at 42.8,35.5 h0.81
  text "Rev B.1" at 42.8,33.548 h0.81
Mechanical 1:
  the board outline again, w0.25